# Altium PCB PCB1.PcbDoc
Units mm, origin at the board's own origin, x right, y up, seen from the top; angles counter-clockwise.
Board outline 16.51 x 8.51 mm, 2 copper layers (Top Layer, Bottom Layer); 8 components, 6 nets, 22 pads, 0 vias.
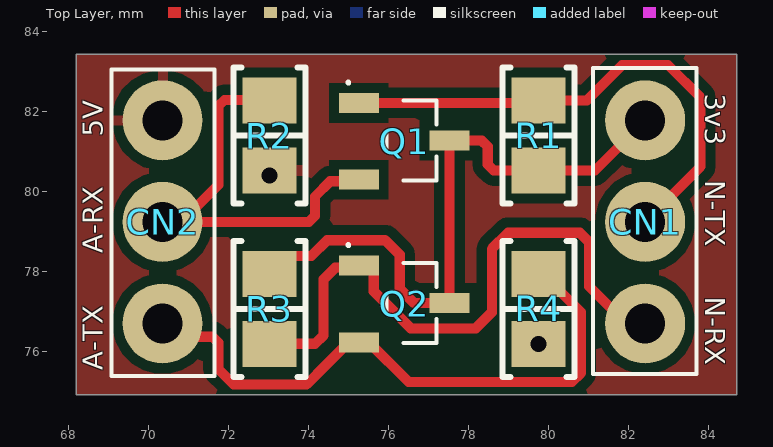
[diagram p0: Top Layer view]
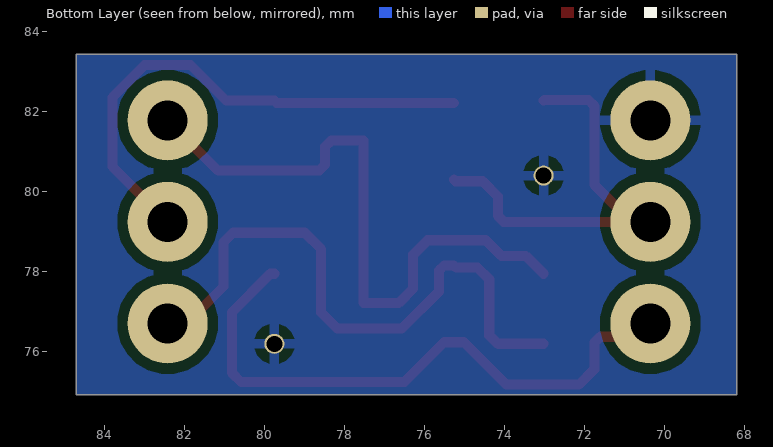
[diagram p1: Bottom Layer view, seen from below]
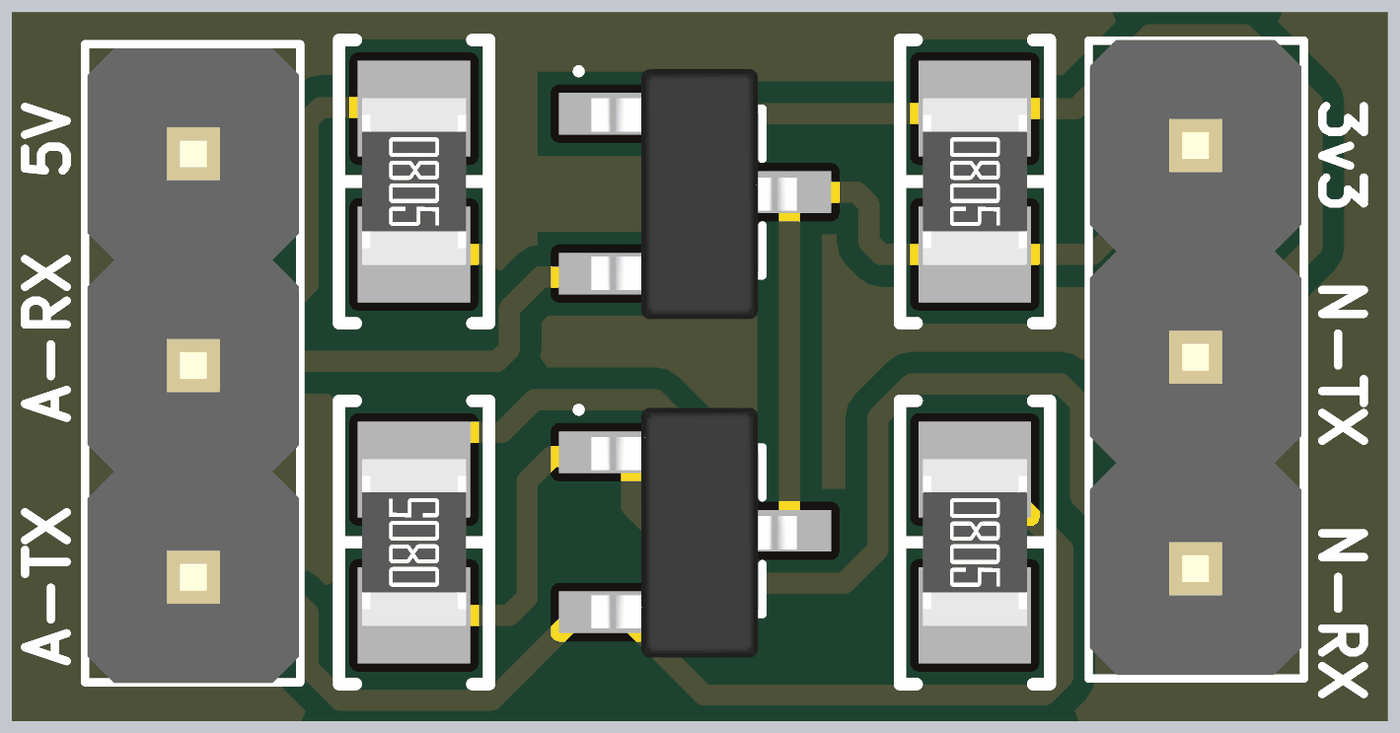
[diagram p2: 3D render of the assembled board from above, using the file's embedded part models]

## Layer stack, top to bottom
Top Solder: solder mask 0.0102, Solder Resist, Dk 3.5
Top Layer: signal copper 0.0356
Dielectric 1: dielectric 0.32, FR-4, Dk 4.8
Bottom Layer: signal copper 0.0356
Bottom Solder: solder mask 0.0102, Solder Resist, Dk 3.5

## Board outline
68.199,74.93 84.709,74.93 84.709,83.439 68.199,83.439

## Design rules (kind name [scope] priority, off if disabled: settings)
Clearance [All] p1: gap=0.254 ignorepadtopadclearanceinfootprint=FALSE except(0: Arc-Hole Track-Hole SMDPad-Hole THPad-Hole Via-Hole Fill-Hole Poly-Hole Region-Hole Text-Hole)
PolygonConnect [All] p1: connectstyle=Relief reliefconductorwidth=0.254 reliefentries=4 polygonreliefangle="90 Angle" airgapwidth=0.254
RoutingVias [All] p1: holewidth=0.711 width=1.27 viastyle="Through Hole" minholewidth=0.711 minwidth=1.27 maxholewidth=0.711 maxwidth=1.27
SolderMaskExpansion [All] p1: expansion=0.102 istentingtop=FALSE
Width [All] p1: maxlimit=0.254 minlimit=0.254 preferedwidth=0.254
30 further rules are at their usual default settings.

## Components (designator, comment, footprint, x,y, rotation, side; value= is the part's Value field where it differs from the comment)
CN1 "3P_HEADER" 3P_HEADER 81.11,83.083 r270 top
CN2 "3P_HEADER" 3P_HEADER 71.671,75.413 r90 top
Q1 "2N7000" 2N7000 76.581,81.28 r270 top
Q2 "2N7000" 2N7000 76.581,77.216 r270 top
R1 "10 kOhms" "RES 0805_2012" 79.756,81.407 r270 top
R2 "10 kOhms" "RES 0805_2012" 73.025,81.407 r270 top
R3 "10 kOhms" "RES 0805_2012" 73.025,77.075 r90 top
R4 "10 kOhms" "RES 0805_2012" 79.756,77.075 r270 top

## Footprints (in the part's own frame and the unit in brackets; to place one, negate y for a bottom-side part, rotate by r counter-clockwise, add the part's x,y. Pads: shape width x height; smd on the part's side, far side on the other; paste and mask are expansions set on the pad)
2N7000 [mm]
  rect 0.5x1 smd: 1(-0.942,-1.317) 2(0.978,-1.317) 3(0,0.95)
  silkscreen extent -1.47,-1.6 1,0.63, body extent -1.48,-1.43 1.52,1.17, height 1.1
3P_HEADER [mm]
  round 2 hole 1: 1(1.295,1.313) 2(3.835,1.313) 3(6.375,1.313)
  silkscreen extent -0.02,0.01 7.64,2.6, body extent -0.03,0.03 7.59,2.57, height 8.38
"RES 0805_2012" [mm] "Chip Resistor, 2-Leads, Body 2.00x1.25mm, IPC Medium Density"
  rect 1.15x1.35 smd: 1(-0.875,0) 2(0.875,0)
  silkscreen extent -1.7,-0.9 1.7,0.9, body extent -1,-0.62 1,0.63, height 0.6

## Part data
R1 R2 R3 R4: library part RNCS0805BKE10K0, "RES 10K OHM 0.1% 1/10W 0805", Device Package="0805 (2012 Metric)", Manufacturer="Stackpole Electronics Inc", Operating Temperature="-55°C ~ 155°C", Power (Watts)="0.1W, 1/10W", Ratings=AEC-Q200, Supplier Device Package=0805, Supplier Part Number 1=RNCS0805BKE10K0CT-ND, Temperature Coefficient=±25ppm/°C, Tolerance=±0.1%, ComponentLink1Description=Datasheet, ComponentLink1URL=https://www.seielect.com/catalog/sei-rncs_rnch.pdf, ComponentLink2Description="DigiKey Link", ComponentLink2URL=https://www.digikey.com/en/products/detail/stackpole-electronics-inc/RNCS0805BKE10K0/1800067, Composition="Thin Film", Features="Anti-Corrosive, Automotive AEC-Q200, Moisture Resistant", Height - Seated (Max)="0.026\" (0.65mm)", LastUpdated="14.02.2022 15:05:09", Lifecycle Status=Active, Minimum Order=1, Number of Terminations=2, Package / Case="0805 (2012 Metric)", Packaging=TapeAndReel, Part Number=RNCS0805BKE10K0, Part Status=Active, PartId=27713, Price=0.09, Resistance="10 kOhms", Series=RNCS, Size / Dimension="0.079\" L x 0.049\" W (2.00mm x 1.25mm)", Supplier 1=DigiKey

## Free pads (board coordinates)
  round 0.5 hole 0.4: ""(73.025,80.405) ""(79.756,76.2)

## Nets (pads, with @x,y where several pads share a name; then routed paths per layer and width w, separated by ;. In a path a pad name is that pad's centre, name@x,y a point inside that pad or via, vN(x,y) a via of type N, cw(c..) or ccw(c..) an arc to the next point about the centre after c; other vN are vias at no path point)
3v3: CN1.1 Q1.3 Q2.3 R1.2 R3.2 | length 16.1
  Top Layer w0.254: R3.2 73.473,78.398 74.081,78.398 74.472,78.789 75.922,78.789 76.286,78.425 76.286,77.58 76.65,77.216 Q2.3 Q1.3 78.337,81.28 78.486,81.131 78.486,80.681 78.635,80.532 R1.2 81.167,80.532 CN1.1
+5: CN2.3 pad. R2.2 R4.2
A_RX: CN2.2 Q1.2 R2.1 | length 10.2
  Top Layer w0.254: CN2.2 CN2.2@70.83,79.248 ; R2.1 73.011,82.296 71.904,82.296 71.755,82.147 71.755,80.173 CN2.2@70.83,79.248 ; Q1.2 75.226,80.264 74.549,80.264 74.168,79.883 74.168,79.397 74.019,79.248 CN2.2@70.83,79.248
A_TX: CN2.1 Q2.2 R4.1 | length 15.4
  Top Layer w0.254: CN2.1 70.692,76.374 71.606,76.374 71.755,76.225 71.755,75.565 72.136,75.184 73.96,75.184 74.466,75.69 75.014,76.238 75.514,76.238 76.508,75.244 80.589,75.244 80.812,75.467 80.812,76.994 79.856,77.95 R4.1
N_RX: CN1.3 Q2.1 R3.1 | length 15.5
  Top Layer w0.254: R3.1 74.168,76.2 74.383,76.415 74.383,77.812 74.676,78.105 75.211,78.105 Q2.1 75.514,78.158 75.637,78.035 75.637,77.511 76.563,76.585 78.189,76.585 78.591,76.987 78.591,78.574 78.993,78.976 80.79,78.976 81.026,78.74 81.026,77.633 81.951,76.708 CN1.3
N_TX: CN1.2 Q1.1 R1.1 | length 13
  Top Layer w0.254: Q1.1 79.696,82.222 R1.1 80.964,82.282 81.851,83.169 82.995,83.169 83.804,82.36 83.804,80.629 CN1.2

## Polygon pours and split planes (outlines as drawn)
+5 on Top Layer "+5_L01_P000" (solid, pour order 0): 68.199,83.439 84.709,83.439 84.709,74.93 68.199,74.93
+5 on Bottom Layer "+5_L02_P001" (solid, pour order 1): 68.199,83.439 84.709,83.439 84.709,74.93 68.199,74.93

## Silkscreen, mask and mechanical layers (free items; w line width, h text height)
Top Overlay:
  text "3v3" at 83.92,82.45 h0.5 r270
  text "5V" at 68.861,81.38 h0.5 r90
  text "N-TX" at 83.92,80.291 h0.5 r270
  text "A-RX" at 68.861,78.459 h0.5 r90
  text "N-RX" at 83.92,77.37 h0.5 r270
  text "A-TX" at 68.861,75.538 h0.5 r90